# Altium PCB captivate_fr2633.PcbDoc (part 1 of 2)
Units mil, origin at the board's own origin, x right, y up, seen from the top; angles counter-clockwise.
Board outline 2500 x 2500 mil, 2 copper layers (Top Layer, Bottom Layer), stack 62 mil thick; 67 components, 64 nets, 248 pads, 53 vias.
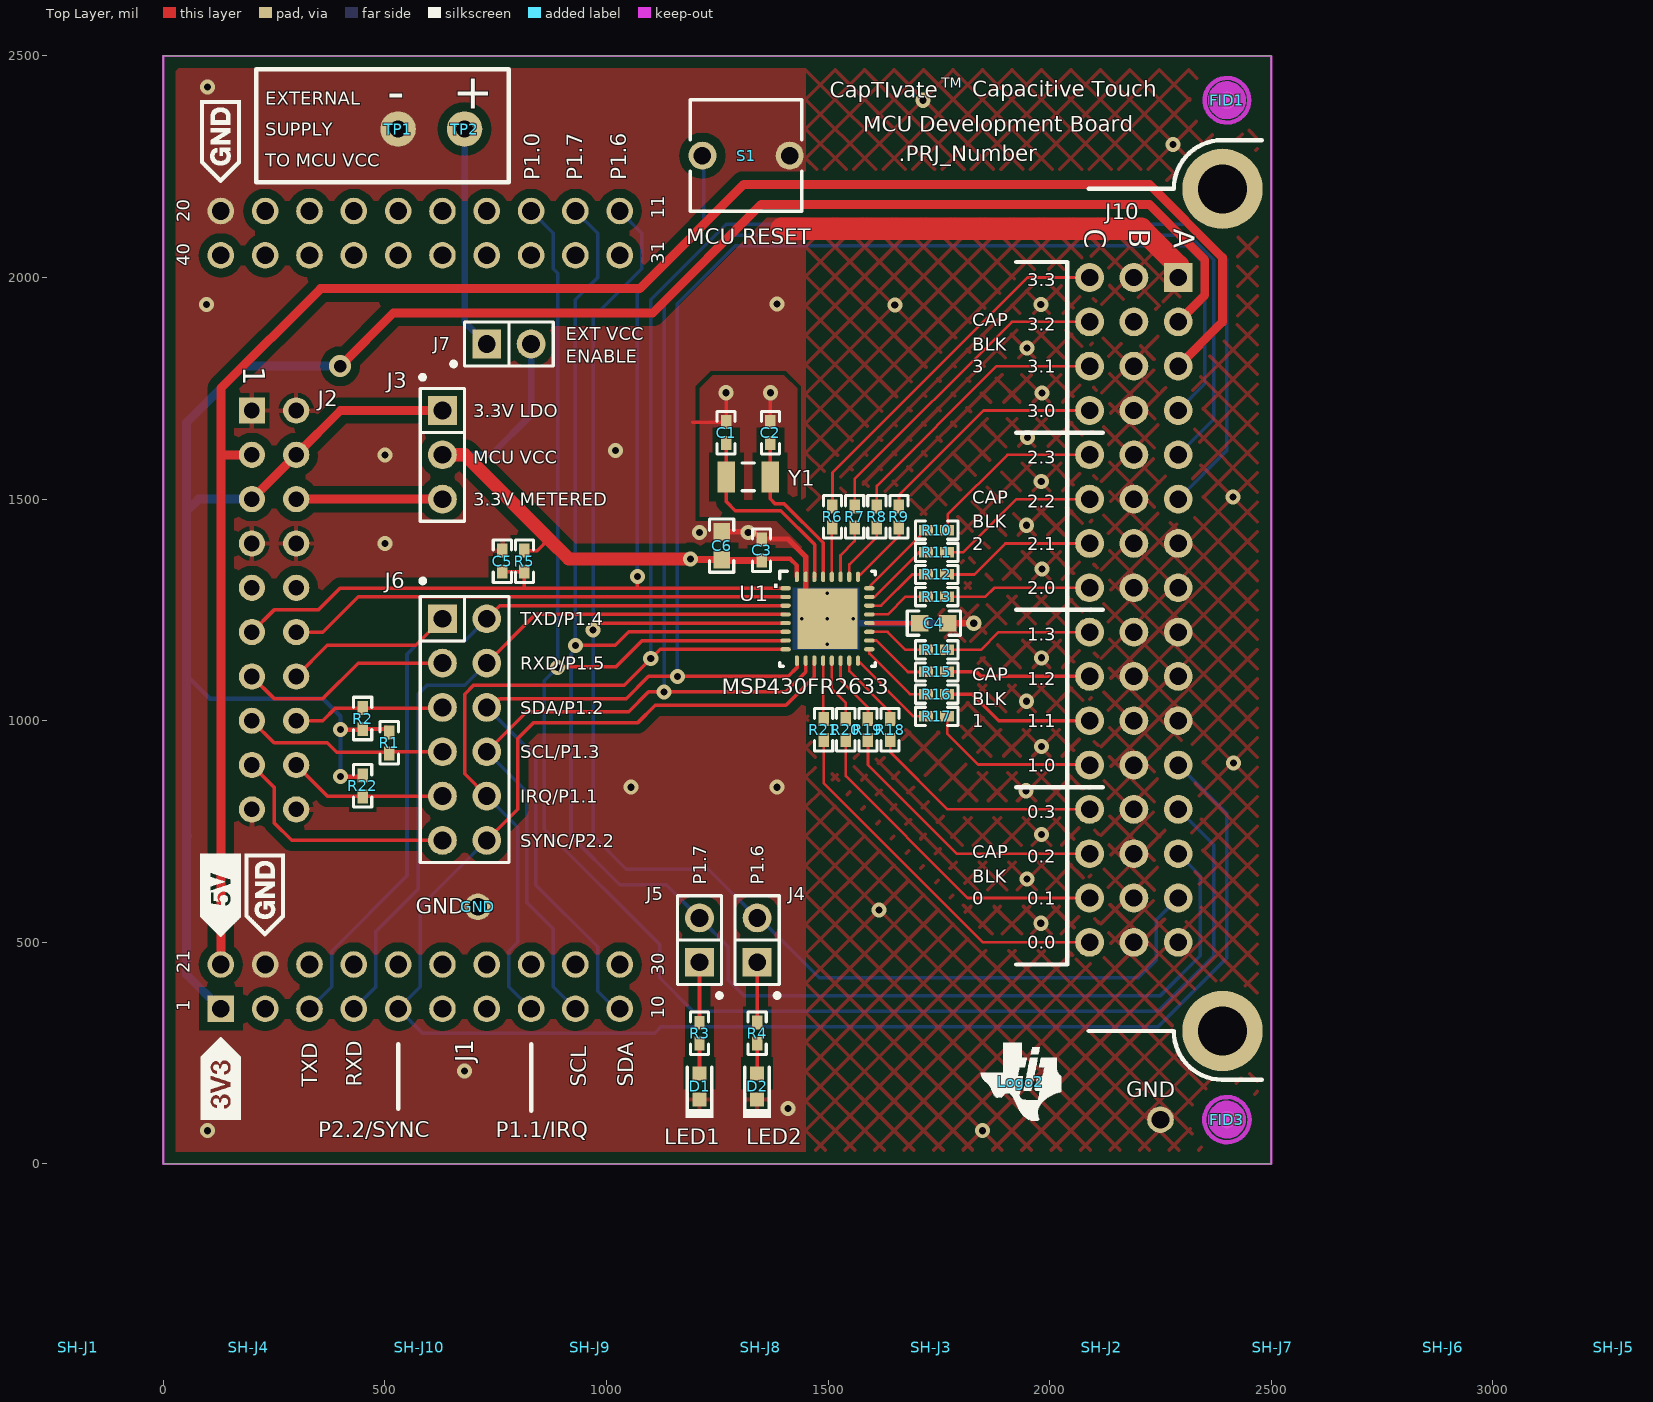
[diagram p0: Top Layer view]
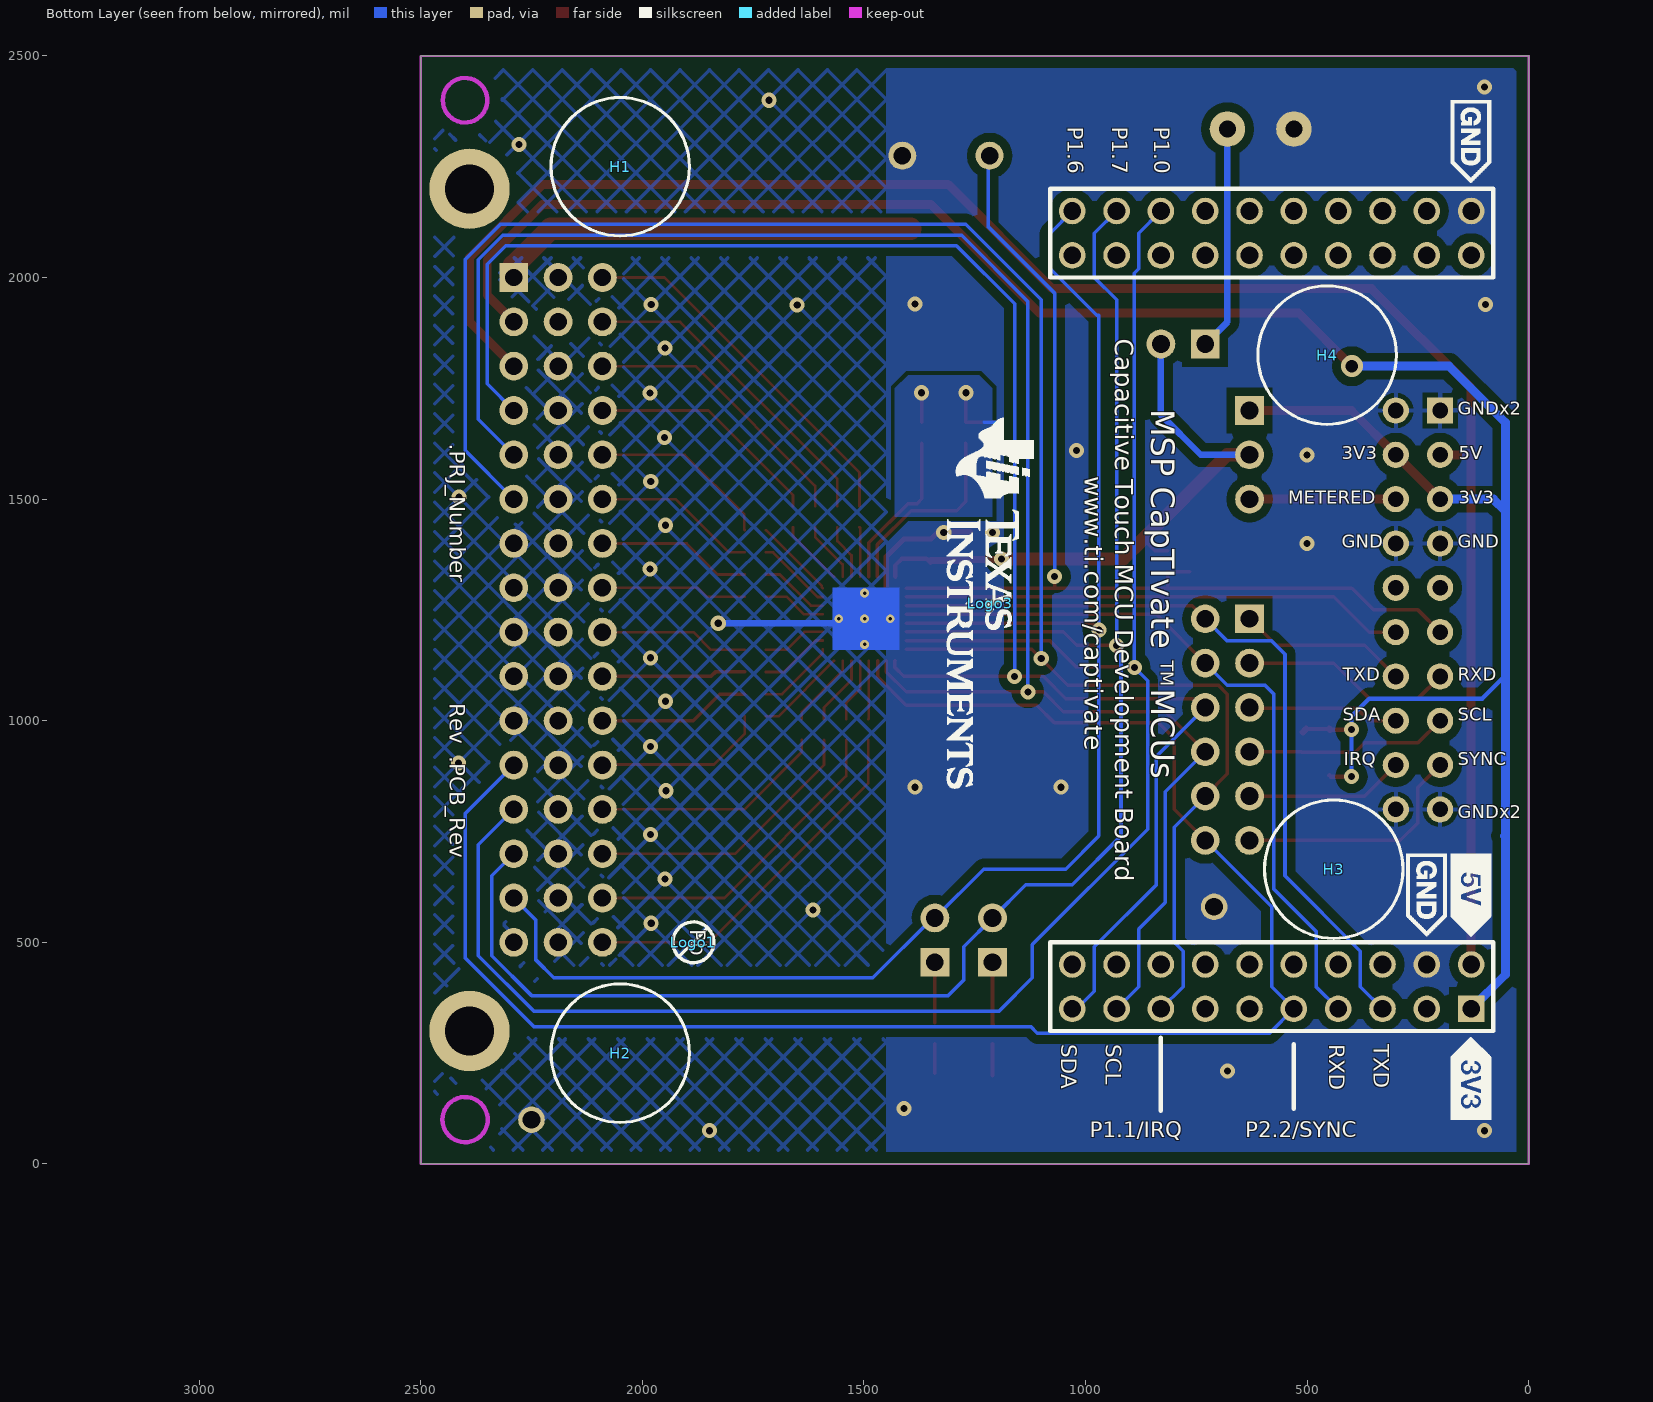
[diagram p1: Bottom Layer view, seen from below]

## Layer stack, top to bottom
Top Solder: solder mask 0.4, Solder Resist, Dk 3.5
Top Layer: signal copper 1.4
Dielectric1: core 59.2, FR-4, Dk 4.2
Bottom Layer: signal copper 1.4
Bottom Solder: solder mask 0.4, Solder Resist, Dk 3.5

## Board outline
0,0 0,2500 2500,2500 2500,0

## Design rules (kind name [scope] priority, off if disabled: settings)
AcuteAngle [All] p1: minimum=4.50000000000000E+0001 checktracksonly=FALSE
AssemblyTestPointUsage [All] p1: valid=2
Clearance Clearance_Keepouts [((IsTrack Or IsArc) And Not InPoly) And IsFree and IsKeepOut vs ((IsTrack Or IsArc) And Not InPoly) And IsFree and IsKeepOut] p1: gap=0
Clearance Clearance_BoardEdge_MountingHoles [OnCopper and InComponentClass('Mounting Holes') vs IsKeepOut] p2: gap=40
Clearance Clearance_BoardEdge_Poly [OnCopper and InPoly vs IsKeepOut] p3: gap=25
Clearance Clearance_Hatched_Poly [OnCopper AND (InNamedPolygon('hatched_gnd_top') OR InNamedPolygon('hatched_gnd_bottom')) vs InNetClass('CAPTIVATE_CONNS')] p4: gap=12
Clearance Clearance_BoardEdge [OnCopper and Not InComponentClass('Logo') and not InComponentClass('FiducialMark') and not InRegion(1000,500,4000,800) and Not IsKeepout vs IsKeepOut] p5: gap=40
Clearance Clearance_Poly [InPolygon] p6: gap=20
Clearance [All] p7: gap=7.87
ComponentClearance ComponentClearance_MountingHoles_FiducialMarks [InComponentClass('Mounting Holes') vs InComponentClass('FiducialMark')] p1: gap=50 collisioncheckmode=3 verticalgap=10 showdistances=FALSE
ComponentClearance ComponentClearance_TH_FiducialMarks [IsThruComponent vs InComponentClass('FiducialMark')] p2: gap=25 collisioncheckmode=3 verticalgap=10 showdistances=FALSE
ComponentClearance ComponentClearance_Shunt [InComponentClass('Header') vs InComponentClass('Shunt')] p3: gap=0 collisioncheckmode=3 verticalgap=0 showdistances=FALSE
ComponentClearance ComponentClearance_Logo [InComponentClass('Logo')] p4: gap=10 collisioncheckmode=3 verticalgap=10 showdistances=TRUE
ComponentClearance ComponentClearance_ScrewToNut [(HasFootprint('NY PMS 440 0025 PH')) vs (HasFootprint('Keystone_1902C'))] p5: gap=5 collisioncheckmode=3 verticalgap=10 showdistances=FALSE
ComponentClearance ComponentClearance_MountingHoles [InComponentClass('Mounting Holes')] p6: gap=250 collisioncheckmode=3 verticalgap=100000 showdistances=FALSE
ComponentClearance ComponentClearance_SmallPassives [HasFootprint('0201*') or HasFootprint('0402*') or HasFootprint('0508') or HasFootprint('0603*') or HasFootprint('0612') or HasFootprint('0805*') or HasFootprint('0815*') or HasFootprint('0830*') or HasFootprint('1206*') or HasFootprint('1210*') or HasFootprint('1808*') or HasFootprint('1812*') or HasFootprint('1825*') or HasFootprint('2010*') or HasFootprint('2220*') or HasFootprint('2225*') or HasFootprint('2512*') or HasFootprint('2728*') or HasFootprint('3518*') vs HasFootprint('0201*') or HasFootprint('0402*') or HasFootprint('0508') or HasFootprint('0603*') or HasFootprint('0612') or HasFootprint('0805*') or HasFootprint('0815*') or HasFootprint('0830*') or HasFootprint('1206*') or HasFootprint('1210*') or HasFootprint('1808*') or HasFootprint('1812*') or HasFootprint('1825*') or HasFootprint('2010*') or HasFootprint('2220*') or HasFootprint('2225*') or HasFootprint('2512*') or HasFootprint('2728*') or HasFootprint('3518*')] p7: gap=20 collisioncheckmode=3 verticalgap=10 showdistances=FALSE
ComponentClearance ComponentClearance_THtoSMT [IsThruComponent vs IsSMTComponent] p8: gap=0 collisioncheckmode=3 verticalgap=0 showdistances=FALSE
ComponentClearance ComponentClearance_THtoTH [IsThruComponent vs IsThruComponent] p9: gap=25 collisioncheckmode=3 verticalgap=100 showdistances=FALSE
ComponentClearance [All] p10: gap=40 collisioncheckmode=3 verticalgap=10 showdistances=FALSE
DiffPairsRouting [All] p1: maxlimit=100 minlimit=10 mostfreqgap=10 toplayer_minwidth=15 toplayer_maxwidth=15 toplayer_prefwidth=15 bottomlayer_minwidth=15 bottomlayer_maxwidth=15 bottomlayer_prefwidth=15 maxuncoupledlength=1000
FabricationTestPointUsage TestPointUsage [All] p1: valid=2 allowmultiple=FALSE
FabricationTestpoint Testpoint [All] p1: side=3 testpointundercomponent=TRUE minsize=40 maxsize=100 preferedsize=60 minholesize=0 maxholesize=40 preferedholesize=32 testpointgrid=1 allowsidetop=TRUE allowsidebottom=TRUE usegrid=TRUE gridtolerance=0.01
FanoutControl Fanout_LCC [IsLCC] p1: bgadir=Out bgaviamode=Centered fanoutstyle=Auto fanoutdirection=Alternating viagrid=1 // Fanout_LCC (Default Rule)
FanoutControl Fanout_BGA [IsBGA] p2: bgadir=Out bgaviamode=Centered fanoutstyle=Auto fanoutdirection=Alternating viagrid=1 // Fanout_BGA (Default Rule)
FanoutControl Fanout_Default [All] p4: bgadir=Out bgaviamode=Centered fanoutstyle=Auto fanoutdirection=Alternating viagrid=1 // Fanout_Default (Default Rule)
FanoutControl Fanout_Small [(CompPinCount < 5)] p5: bgadir=Out bgaviamode=Centered fanoutstyle=Auto fanoutdirection=OutThenIn viagrid=1 // Fanout_Small (Default Rule)
HoleSize [All] p1: absolutevalues=TRUE maxlimit=251 minlimit=7.87 maxpercent=80.000 minpercent=20.000
MinimumAnnularRing MinimumAnnularRing_ThermalPadVias [IsVia and InAnyComponent] p1: minimumring=5.91
MinimumAnnularRing [All] p2: minimumring=7
MinimumSolderMaskSliver MinimumSolderMaskSliver_Logo [InComponentClass('Logo') vs InComponentClass('Logo')] p1: minsoldermaskwidth=0.7
MinimumSolderMaskSliver [All] p2: minsoldermaskwidth=3.94
PlaneConnect [All] p1: planeconnectstyle=Relief reliefexpansion=10 reliefentries=4 reliefconductorwidth=10 reliefairgap=10
PolygonConnect PolygonConnect_solid [OnCopper AND InNet('GND') AND (InNamedPolygon('solid_gnd_top') OR InNamedPolygon('solid_gnd_bottom'))] p1: connectstyle=Relief reliefconductorwidth=10 reliefentries=4 polygonreliefangle="90 Angle" airgapwidth=10
PolygonConnect PolygonConnect_through_hole [(InPadClass('Through Hole'))] p2: connectstyle=Relief reliefconductorwidth=10 reliefentries=4 polygonreliefangle="90 Angle" airgapwidth=10
PolygonConnect PolygonConnect_vias [InNet('GND') AND IsVia] p3: connectstyle=Direct reliefconductorwidth=10 reliefentries=4 polygonreliefangle="90 Angle" airgapwidth=10
PolygonConnect [All] p4: connectstyle=Direct reliefconductorwidth=10 reliefentries=4 polygonreliefangle="90 Angle" airgapwidth=10
RoutingVias ThermalPadVias [IsVia and InAnyComponent] p1: holewidth=7.87 width=19.68 viastyle="Through Hole" minholewidth=7.87 minwidth=19.68 maxholewidth=12.99 maxwidth=23.62
RoutingVias [All] p2: holewidth=16 width=34 viastyle="Through Hole" minholewidth=7.87 minwidth=26 maxholewidth=40 maxwidth=65
SilkToBoardRegionClearance [Not ((IsComment or IsDesignator) And (Hide <> 'False')) and not InRegion(1000,500,4000,800)] p1:
SilkToSilkClearance SilkToSilkClearance_Pb-FreeLogo [(HasFootprint('Pb-Free_Overlay_Medium') OR HasFootprint('Pb-Free_Overlay_Small')) vs (HasFootprint('Pb-Free_Overlay_Medium') OR HasFootprint('Pb-Free_Overlay_Small'))] p1: silktosilkclearance=0
SilkToSilkClearance [All] p2: silktosilkclearance=5
SilkToSolderMaskClearance "Silk to Solder Mask Opening" [All] p1: minsilkscreentomaskgap=1 clearancetoexposedcopper=FALSE
SolderMaskExpansion [All] p1: expansion=3
UnpouredPolygon [All] p1: allowunpoured=FALSE
Width [All] p1: maxlimit=100 minlimit=6 preferedwidth=8 checkconnectedcopper=TRUE
14 further rules are at their usual default settings.

## Classes and differential pairs
net class J1_Nets: GND NetJ1_1 NetJ1_2 NetJ1_3 NetJ1_4 NetJ1_5 NetJ1_6 NetJ1_7 NetJ1_8 NetJ1_9 NetJ1_10 NetJ1_11 NetJ1_12 NetJ1_13 NetJ1_14 NetJ1_15 NetJ1_16 NetJ1_17 NetJ1_18 NetJ1_19 NetJ1_20 P1.0 P1.1/IRQ P1.6/LED2 P1.7/LED1 P2.2/SYNC UCA0_RXD UCA0_TXD UCB0_SCL UCB0_SDA VCC_5V VCC_LDO
pad class "Through Hole": C5-2 D1-2 D2-2 J2-1 J2-2 J2-7 J2-8 J2-19 J2-20 TP4-1
component class Shunt: SH-J1 SH-J2 SH-J3 SH-J4 SH-J5 SH-J6 SH-J7 SH-J8 SH-J9 SH-J10
component class Logo: Logo2 Logo3
component class AssemblyNote: ZZ1 ZZ2 ZZ3 ZZ4
component class processor: C1 C2 C3 C4 C5 C6 D1 D2 GND J1 J2 J3 J4 J5 J6 J7 J10 R1 R2 R3 R4 R5 R6 R7 R8 R9 R10 R11 R12 R13 R14 R15 R16 R17 R18 R19 R20 R21 R22 S1 TP1 TP2 U1 Y1
component class Header: J1 J3 J4 J5 J6 J7
net class C1_Nets: GND XIN
net class C6_Nets: GND VCC_MSP
net class C3_Nets: GND VCC_MSP
net class C4_Nets: GND VREG
net class C5_Nets: EZFET_SBWTDIO_RST GND
net class C2_Nets: GND XOUT
net class D1_Nets: GND NetD1_1
net class D2_Nets: GND NetD2_1
net class J2_Nets: EZFET_RXD EZFET_SBWTCK_TST EZFET_SBWTDIO_RST EZFET_TXD GND MSP_IRQ MSP_RXD MSP_SCL MSP_SDA MSP_SYNC MSP_TXD VCC_5V VCC_LDO VCC_METERED
net class J3_Nets: VCC_LDO VCC_METERED VCC_MSP
net class J4_Nets: NetJ4_1 P1.6/LED2
net class J5_Nets: NetJ5_1 P1.7/LED1
net class J7_Nets: NetJ7_1 VCC_MSP
net class J6_Nets: MSP_IRQ MSP_RXD MSP_SCL MSP_SDA MSP_SYNC MSP_TXD P1.1/IRQ P2.2/SYNC UCA0_RXD UCA0_TXD UCB0_SCL UCB0_SDA
net class TP1_Nets: GND
net class R2_Nets: MSP_SDA VCC_LDO
net class R1_Nets: MSP_SCL VCC_LDO
net class R3_Nets: NetD1_1 NetJ5_1
net class R4_Nets: NetD2_1 NetJ4_1
net class R5_Nets: EZFET_SBWTDIO_RST VCC_MSP
net class R6_Nets: CAP3.3 NetJ10_c1
net class R7_Nets: CAP3.2 NetJ10_c2
net class R8_Nets: CAP3.1 NetJ10_c3
net class R9_Nets: CAP3.0 NetJ10_c4
net class R10_Nets: CAP2.3 NetJ10_c5
net class R11_Nets: CAP2.2 NetJ10_c6
net class R12_Nets: CAP2.1 NetJ10_c7
net class R13_Nets: CAP2.0 NetJ10_c8
net class R14_Nets: CAP1.3 NetJ10_c9
net class R15_Nets: CAP1.2 NetJ10_c10
net class R16_Nets: CAP1.1 NetJ10_c11
net class R17_Nets: CAP1.0 NetJ10_c12
net class R18_Nets: CAP0.3 NetJ10_c13
net class R19_Nets: CAP0.2 NetJ10_c14
net class R20_Nets: CAP0.1 NetJ10_c15
net class R21_Nets: CAP0.0 NetJ10_c16
net class R22_Nets: MSP_IRQ VCC_LDO
net class S1_Nets: EZFET_SBWTDIO_RST GND
net class U1_Nets: CAP0.0 CAP0.1 CAP0.2 CAP0.3 CAP1.0 CAP1.1 CAP1.2 CAP1.3 CAP2.0 CAP2.1 CAP2.2 CAP2.3 CAP3.0 CAP3.1 CAP3.2 CAP3.3 EZFET_SBWTCK_TST EZFET_SBWTDIO_RST GND P1.0 P1.1/IRQ P1.6/LED2 P1.7/LED1 P2.2/SYNC UCA0_RXD UCA0_TXD UCB0_SCL UCB0_SDA VCC_MSP VREG XIN XOUT
net class Y1_Nets: XIN XOUT
net class J10_Nets: GND NetJ10_c1 NetJ10_c2 NetJ10_c3 NetJ10_c4 NetJ10_c5 NetJ10_c6 NetJ10_c7 NetJ10_c8 NetJ10_c9 NetJ10_c10 NetJ10_c11 NetJ10_c12 NetJ10_c13 NetJ10_c14 NetJ10_c15 NetJ10_c16 P1.0 P1.1/IRQ P1.6/LED2 P1.7/LED1 P2.2/SYNC UCB0_SCL UCB0_SDA VCC_5V VCC_LDO
net class CAPTIVATE_CONNS: NetJ10_c1 NetJ10_c2 NetJ10_c3 NetJ10_c4 NetJ10_c5 NetJ10_c6 NetJ10_c7 NetJ10_c8 NetJ10_c9 NetJ10_c10 NetJ10_c11 NetJ10_c12 NetJ10_c13 NetJ10_c14 NetJ10_c15 NetJ10_c16
component class hardware: FID1 FID3 H1 H2 H3 H4 Logo1 Logo2 Logo3 SH-J1 SH-J2 SH-J3 SH-J4 SH-J5 SH-J6 SH-J7 SH-J8 SH-J9 SH-J10 ZZ1 ZZ2 ZZ3 ZZ4
component class FiducialMark: FID1 FID3
net class GND_Nets: GND
net class TP2_Nets: NetJ7_1

## Components (designator, comment, footprint, x,y, rotation, side; value= is the part's Value field where it differs from the comment)
C1 "GRM1555C1H220JA01D" 0402 1270,1650 r90 top
C2 "GRM1555C1H220JA01D" 0402 1370,1650 r90 top
C3 "C1005X5R1A104K" 0402 1350,1385 r90 top
C4 "C1608X5R1A105K" 0603 1738.66,1220 r0 top
C5 "C1005X7R1H102K" 0402 765,1360 r90 top
C6 "CGB3B1X5R1A475K055AC" 0603 1260,1395 r90 top
D1 "LTST-C190GKT" LED_LTST-C190 1210,175 r270 top
D2 "LTST-C190GKT" LED_LTST-C190 1340,175 r270 top
FID1 "Fiducial" Fiducial10-20 2400,2400 r90 top
FID3 "Fiducial" Fiducial10-20 2400,100 r90 top
GND "TESTPOINT" TP_VIA_060RND040 710,580 r90 top
H1 "SJ61A1" Bumpon_SJ61A1 2050,2250 r180 bottom
H2 "SJ61A1" Bumpon_SJ61A1 2050,250 r180 bottom
H3 "SJ61A1" Bumpon_SJ61A1 440,665 r180 bottom
H4 "SJ61A1" Bumpon_SJ61A1 455,1825 r180 bottom
J1 "TSW-110-07-G-S" "40Pin BP" 580,1250 r90 top locked
J2 "Connector 10X2RA" CONN2X10RA 200,1699.95 r270 top locked
J3 "HTSW-103-07-G-S" Samtec_HTSW-103-07-G-S 630,1600 r270 top
J4 "HTSW-102-07-G-S" Samtec_HTSW-102-07-G-S 1340,505 r90 top
J5 "HTSW-102-07-G-S" Samtec_HTSW-102-07-G-S 1210,505 r90 top
J6 "TSW-106-07-G-D" TSW-106-07-G-D 680,980 r270 top
J7 "HTSW-102-07-G-S" Samtec_HTSW-102-07-G-S 780,1850 r0 top
J10 "09 28 248 6921" CAPTIVATE-CONN-48-NONUM 2498.66,1250 r270 top locked
Logo1 "Pb-Free Symbol" Pb-Free_Overlay_Small 1885,500 r270 bottom
Logo2 "Texas Instruments" TI_Symbol_Overlay_Small 1935,185 r0 top
Logo3 "Texas Instruments" TI_Stacked_Overlay_Small 1215,1265 r270 bottom
R1 "CRCW04022K20JNED" 0402 510,950 r90 top
R2 "CRCW04022K20JNED" 0402 450,1005 r270 top
R3 "CRCW0402390RJNED" 0402 1209.99,294.99 r90 top
R4 "CRCW0402390RJNED" 0402 1340,295 r90 top
R5 "CRCW040247K0JNED" 0402 815,1360 r90 top
R6 "CRCW0402470RJNED" 0402 1510,1460 r270 top
R7 "CRCW0402470RJNED" 0402 1560,1460 r270 top
R8 "CRCW0402470RJNED" 0402 1610,1460 r270 top
R9 "CRCW0402470RJNED" 0402 1660,1460 r270 top
R10 "CRCW0402470RJNED" 0402 1745,1430 r180 top
R11 "CRCW0402470RJNED" 0402 1745,1380 r180 top
R12 "CRCW0402470RJNED" 0402 1745,1330 r180 top
R13 "CRCW0402470RJNED" 0402 1745,1280 r180 top
R14 "CRCW0402470RJNED" 0402 1745,1160 r180 top
R15 "CRCW0402470RJNED" 0402 1745,1110 r180 top
R16 "CRCW0402470RJNED" 0402 1745,1060 r180 top
R17 "CRCW0402470RJNED" 0402 1745,1010 r180 top
R18 "CRCW0402470RJNED" 0402 1640,980 r90 top
R19 "CRCW0402470RJNED" 0402 1590,980 r90 top
R20 "CRCW0402470RJNED" 0402 1540,980 r90 top
R21 "CRCW0402470RJNED" 0402 1490,980 r90 top
R22 "CRCW040210K0JNED" 0402 450,853 r90 top
S1 "EVQ-21505R" SW_EVQ-21x05 1315,2275 r180 top
SH-J1 "SPC02SYAN" SPC02SYAN -192,-414 r90 top
SH-J2 "SPC02SYAN" SPC02SYAN 2118,-414 r90 top
SH-J3 "SPC02SYAN" SPC02SYAN 1733,-414 r90 top
SH-J4 "SPC02SYAN" SPC02SYAN 193,-414 r90 top
SH-J5 "SPC02SYAN" SPC02SYAN 3273,-414 r90 top
SH-J6 "SPC02SYAN" SPC02SYAN 2888,-414 r90 top
SH-J7 "SPC02SYAN" SPC02SYAN 2503,-414 r90 top
SH-J8 "SPC02SYAN" SPC02SYAN 1348,-414 r90 top
SH-J9 "SPC02SYAN" SPC02SYAN 963,-414 r90 top
SH-J10 "SPC02SYAN" SPC02SYAN 578,-414 r90 top
TP1 "-" TESTPOINT 530,2335 r0 top
TP2 "+" TESTPOINT 680,2335 r0 top
U1 "MSP430FR2633IRHB" RHB0032E 1498.66,1230.08 r0 top locked
Y1 "FC-135 32.7680KA-A3" Epson_FC-135 1320,1550 r0 top
ZZ1 "All Jumpers to be installed (Note: J3 jumper installed between 3.3V LDO and MCU VCC pins)" AssemblyNote -460,3060 r0 top
ZZ2 "These assemblies are ESD sensitive, ESD precautions shall be observed." AssemblyNote -465,2979.11 r0 top
ZZ3 "These assemblies must be clean and free from flux and all contaminants. Use of no clean flux is not acceptable." AssemblyNote -465,2890.56 r0 top
ZZ4 "These assemblies must comply with workmanship standards IPC-A-610 Class 2, unless otherwise specified." AssemblyNote -465,2802 r0 top

## Footprints (in the part's own frame and the unit in brackets; to place one, negate y for a bottom-side part, rotate by r counter-clockwise, add the part's x,y. Pads: shape width x height; smd on the part's side, far side on the other; paste and mask are expansions set on the pad)
"40Pin BP" [mil] "40Pin Booster Pack Connection (Top - male; Bottom - female)"
  rect 60x60 hole 40: 1(-900,450)
  round 60 hole 40: 2(-900,350) 3(-900,250) 4(-900,150) 5(-900,50) 6(-900,-50) 7(-900,-150) 8(-900,-250) 9(-900,-350) 10(-900,-450) 11(900,-450) 12(900,-350) 13(900,-250) 14(900,-150) 15(900,-50) 16(900,50) 17(900,150) 18(900,250) 19(900,350) 20(900,450) 21(-800,450) 22(-800,350) 23(-800,250) 24(-800,150) 25(-800,50) 26(-800,-50) 27(-800,-150) 28(-800,-250) 29(-800,-350) 30(-800,-450) 31(800,-450) 32(800,-350) 33(800,-250) 34(800,-150) 35(800,-50) 36(800,50) 37(800,150) 38(800,250) 39(800,350) 40(800,450)
  silkscreen extent -1150,305 1150,495, body extent -950,-500 950,500, height 335
0402 [mm] "0402 from SM-752 data"
  rect 0.8x0.6 smd: 1(-0.6,0) 2(0.6,0)
  silkscreen extent -1.22,-0.52 1.22,0.52, body extent -0.55,-0.3 0.55,0.3, height 0.6
0603 [mm] "0603 from SM-752 data"
  rect 1x0.95 smd: 1(-0.8,0) 2(0.8,0)
  silkscreen extent -1.52,-0.69 1.52,0.69, body extent -0.87,-0.47 0.87,0.47, height 0.85
AssemblyNote [mil] "Assembly Note"
Bumpon_SJ61A1 [mil] "3M Cylindrical Bumpon black"
  round 1 on Mech4: 0(0,0)
  silkscreen extent -156,-156 156,156, body extent -156,-155 156,156, height 201
CAPTIVATE-CONN-48-NONUM [mm] "Connector, 3x16, 100mil, TH, RA"
  rect 1.65x1.65 hole 1: A1(-19.05,-5.3)
  round 1.65 hole 1: A2(-16.51,-5.3) A3(-13.97,-5.3) A4(-11.43,-5.3) A5(-8.89,-5.3) A6(-6.35,-5.3) A7(-3.81,-5.3) A8(-1.27,-5.3) A9(1.27,-5.3) A10(3.81,-5.3) A11(6.35,-5.3) A12(8.89,-5.3) A13(11.43,-5.3) A14(13.97,-5.3) A15(16.51,-5.3) A16(19.05,-5.3) B1(-19.05,-7.84) B2(-16.51,-7.84) B3(-13.97,-7.84) B4(-11.43,-7.84) B5(-8.89,-7.84) B6(-6.35,-7.84) B7(-3.81,-7.84) B8(-1.27,-7.84) B9(1.27,-7.84) B10(3.81,-7.84) B11(6.35,-7.84) B12(8.89,-7.84) B13(11.43,-7.84) B14(13.97,-7.84) B15(16.51,-7.84) B16(19.05,-7.84) C1(-19.05,-10.38) C2(-16.51,-10.38) C3(-13.97,-10.38) C4(-11.43,-10.38) C5(-8.89,-10.38) C6(-6.35,-10.38) C7(-3.81,-10.38) C8(-1.27,-10.38) C9(1.27,-10.38) C10(3.81,-10.38) C11(6.35,-10.38) C12(8.89,-10.38) C13(11.43,-10.38) C14(13.97,-10.38) C15(16.51,-10.38) C16(19.05,-10.38)
  round 4.6 hole 2.8: H1(-24.13,-2.76) H2(24.13,-2.76)
  silkscreen extent -26.92,-10.41 26.92,-0.51, body extent -26.92,-5.33 26.92,6.86, height 6.6
CONN2X10RA [mm] "Connector;F-Receptacle; 10x2 Position; Right Angle"
  rect 1.5x1.5 hole 0.9: 1(0,0)
  round 1.5 hole 0.9: 2(0,2.54) 3(2.54,0) 4(2.54,2.54) 5(5.08,0) 6(5.08,2.54) 7(7.62,0) 8(7.62,2.54) 9(10.16,0) 10(10.16,2.54) 11(12.7,0) 12(12.7,2.54) 13(15.24,0) 14(15.24,2.54) 15(17.78,0) 16(17.78,2.54) 17(20.32,0) 18(20.32,2.54) 19(22.86,0) 20(22.86,2.54)
  body extent -1.52,-10.03 24.38,-1.52, height 4.95
Epson_FC-135 [mm] "SMD, 2-Leads, Body 3.2x1.5mm"
  rect 1x1.8 smd: 1(-1.25,0) 2(1.25,0)
  silkscreen extent -0.35,-0.8 0.35,0.8, body extent -1.65,-0.8 1.65,0.8, height 0.9
Fiducial10-20 [mm]
  round 1 smd mask+0.5: 1(0,0)
  Top Layer keep-out circle w1.178: c0,0 r0.5
LED_LTST-C190 [mm] "Lite-On"
  rect 0.8x0.8 smd: 1(-0.75,0) 2(0.75,0)
  silkscreen extent -1.1,-0.8 1.8,0.8, body extent -0.85,-0.45 0.85,0.45, height 0.9
Pb-Free_Overlay_Small [mil]
  silkscreen extent -46,-46 46,46
RHB0032E [mm] "QFN, 32-Leads, Body 5x5mm, Pitch 0.5mm, Thermal Pad 3.45x3.45mm, TI Recommended"
  oval 0.6x0.24 smd: 1(-2.4,1.75) 2(-2.4,1.25) 3(-2.4,0.75) 4(-2.4,0.25) 5(-2.4,-0.25) 6(-2.4,-0.75) 7(-2.4,-1.25) 8(-2.4,-1.75) 17(2.4,-1.75) 18(2.4,-1.25) 19(2.4,-0.75) 20(2.4,-0.25) 21(2.4,0.25) 22(2.4,0.75) 23(2.4,1.25) 24(2.4,1.75)
  oval 0.24x0.6 smd: 9(-1.75,-2.4) 10(-1.25,-2.4) 11(-0.75,-2.4) 12(-0.25,-2.4) 13(0.25,-2.4) 14(0.75,-2.4) 15(1.25,-2.4) 16(1.75,-2.4) 25(1.75,2.4) 26(1.25,2.4) 27(0.75,2.4) 28(0.25,2.4) 29(-0.25,2.4) 30(-0.75,2.4) 31(-1.25,2.4) 32(-1.75,2.4)
  rect 3.45x3.45 smd paste-1.725: 33(0,0)
  silkscreen extent -2.72,-2.73 2.72,2.73, body extent -2.57,-2.57 2.58,2.58, height 1.01
Samtec_HTSW-102-07-G-S [mm] "Samtec 100mil, 1x2, 230 mil above insulator"
  rect 1.65x1.65 hole 1.016: 1(-1.27,0)
  round 1.65 hole 1.016: 2(1.27,0)
  silkscreen extent -3.3,-1.27 2.54,1.27, body extent -2.54,-1.27 2.54,1.27, height 8.38
Samtec_HTSW-103-07-G-S [mm] "Samtec 100mil, 1x3, 230 mil above insulator"
  rect 1.65x1.65 hole 1.016: 1(-2.54,0)
  round 1.65 hole 1.016: 2(0,0) 3(2.54,0)
  silkscreen extent -4.57,-1.27 3.81,1.27, body extent -3.81,-1.27 3.81,1.27, height 8.38
SPC02SYAN [mil] "SULLINS"
  round 1 on Mech3: 0(0,0)
  body extent -98,-47 99,47, height 366
SW_EVQ-21x05 [mm] "Panasonic"
  round 1.6 hole 1: 1(-2.5,0) 2(2.5,0)
  silkscreen extent -3.2,-3.2 3.2,3.2, body extent -3.15,-3.15 3.15,3.15, height 5.2
TESTPOINT [mil]
  round 80 hole 37.99: 1(0,0)
TI_Stacked_Overlay_Small [mil]
  silkscreen extent -418,-98 418,98
TI_Symbol_Overlay_Small [mil]
  silkscreen extent -90,-88 91,88
TP_VIA_060RND040 [mil] "TP_VIA_060RND040"
  round 60 hole 40: 1(0,0)
TSW-106-07-G-D [mm] "Samtec 100mil, 2x6, 230 mil above insulator"
  rect 1.65x1.65 hole 1.016: 1(-6.35,-1.27)
  round 1.65 hole 1.016: 2(-6.35,1.27) 3(-3.81,-1.27) 4(-3.81,1.27) 5(-1.27,-1.27) 6(-1.27,1.27) 7(1.27,-1.27) 8(1.27,1.27) 9(3.81,-1.27) 10(3.81,1.27) 11(6.35,-1.27) 12(6.35,1.27)
  silkscreen extent -8.64,-2.54 7.62,2.54, body extent -7.62,-2.54 7.62,2.54, height 8.38

## Part data
C1 C2: "CAP, CERM, 22 pF, 50 V, +/- 5%, C0G/NP0, 0402"
C3: "CAP, CERM, 0.1uF, 10V, +/-10%, X5R, 0402"
C4: "CAP, CERM, 1 µF, 10 V, +/- 10%, X5R, 0603"
C5: "CAP, CERM, 1000pF, 50V, +/-10%, X7R, 0402"
C6: "CAP, CERM, 4.7 µF, 10 V, +/- 10%, X5R, 0603"
D1 D2: "LED, Green, SMD"
FID1 FID3: "Fiducial mark.  There is nothing to buy or mount."
GND: "TEST POINT.  No entry in BOM."
H1 H2 H3 H4: "Bumpon, Cylindrical, 0.312 X 0.200, Black"
J1: library part "BoosterPack Connector", "Header, 100mil, 10x1, Gold, TH"
J2: "Connector, Female, 10-Pin, 2 row, Right Angle"
J3: "Header, 100mil, 3x1, Gold, TH"
J4 J5 J7: "Header, 100mil, 2x1, Gold, TH"
J6: "Header, 100mil, 6x2, Gold, TH"
J10: library part CAPTIVATE-CONN-MSP-EXP430FR2633-PROC, "CapTIvate Processor-Side Connector, 3x16, 100mil, TH, RA, F, MSP-EXP430FR2633"
Logo1: library part Pb-Free
Logo2 Logo3: library part TI_Logo, "Texas Instrument Corporate Signature"
R1 R2: "RES, 2.2 k, 5%, 0.063 W, 0402"
R3 R4: "RES, 390 ohm, 5%, 0.063W, 0402"
R5: "RES, 47k ohm, 5%, 0.063W, 0402"
R6 R7 R8 R9 R10 R11 R12 R13 R14 R15 R16 R17 R18 R19 R20 R21: "RES, 470, 5%, 0.063 W, 0402"
R22: "RES, 10 k, 5%, 0.063 W, 0402"
S1: "Switch, Tactile, SPST-NO, 0.02A, 15V, TH"
SH-J1 SH-J2 SH-J3 SH-J4 SH-J5 SH-J6 SH-J7 SH-J8 SH-J9 SH-J10: "Shunt, 100mil, Flash Gold, Black"
TP1 TP2: library part TESTPOINT, "TEST POINT.  No entry in BOM."
U1: "MSP430 Captivate Microcontroller"
Y1: "Crystal, 32.768 KHz, 12.5 pF, SMD"
ZZ1 ZZ2 ZZ3 ZZ4: library part AssemblyNote

## Free pads (board coordinates)
  round 60 hole 40: 1(2250,100)

## Via types
v1: diameter 34, hole 16, Top Layer to Bottom Layer, tented both sides, 47 vias
v2: diameter 19.68, hole 7.87, Top Layer to Bottom Layer, 5 vias
v3: diameter 50, hole 28, Top Layer to Bottom Layer, tented both sides, 1 vias

## Nets (pads, with @x,y where several pads share a name; then routed paths per layer and width w, separated by ;. In a path a pad name is that pad's centre, name@x,y a point inside that pad or via, vN(x,y) a via of type N, cw(c..) or ccw(c..) an arc to the next point about the centre after c; other vN are vias at no path point)
CAP0.0: R21.2 U1.12 | length 132.5
  Top Layer w6: U1.12@1488.82,1135.59 1488.82,1004.8 R21.2@1490,1003.62
CAP0.1: R20.2 U1.13 | length 145
  Top Layer w6: U1.13@1508.5,1135.59 1508.5,1071.5 1540,1040 R20.2@1540,1003.62
CAP0.2: R19.2 U1.14 | length 157.6
  Top Layer w6: U1.14@1528.19,1135.59 1528.19,1091.81 1590,1030 R19.2@1590,1003.62
CAP0.3: R18.2 U1.15 | length 170.1
  Top Layer w6: U1.15@1547.87,1135.59 1547.87,1112.13 1640,1020 R18.2@1640,1003.62
CAP1.0: R17.2 U1.16 | length 206.7
  Top Layer w6: U1.16@1568.15,1135 U1.16@1567.56,1135.59 1693.15,1010 R17.2@1721.38,1010
CAP1.1: R16.2 U1.17 | length 175.6
  Top Layer w6: U1.17@1593.15,1161.18 1593.15,1151.85 1685,1060 R16.2@1721.38,1060
CAP1.2: R15.2 U1.18 | length 157.6
  Top Layer w6: U1.18@1593.15,1180.87 1609.13,1180.87 1680,1110 R15.2@1721.38,1110
CAP1.3: R14.2 U1.19 | length 145
  Top Layer w6: U1.19@1593.15,1200.55 1634.45,1200.55 1675,1160 R14.2@1721.38,1160
CAP2.0: R13.2 U1.21 | length 144.8
  Top Layer w6: U1.21@1593.15,1239.92 1634.92,1239.92 1675,1280 R13.2@1721.38,1280
CAP2.1: R12.2 U1.22 | length 157.4
  Top Layer w6: U1.22@1593.15,1259.61 1619.61,1259.61 1690,1330 R12.2@1721.38,1330
CAP2.2: R11.2 U1.23 | length 169.9
  Top Layer w6: U1.23@1593.15,1279.29 1604.29,1279.29 1705,1380 R11.2@1721.38,1380
CAP2.3: R10.2 U1.24 | length 184.1
  Top Layer w6: U1.24@1593.15,1298.98 1595,1300.83 1595,1303.62 R10.2@1721.38,1430
CAP3.0: R9.2 U1.25 | length 150.1
  Top Layer w6: U1.25@1567.56,1324.57 1660,1417.01 R9.2@1660,1436.38
CAP3.1: R8.2 U1.26 | length 137.5
  Top Layer w6: U1.26@1547.87,1324.57 1547.87,1352.87 1610,1415 R8.2@1610,1436.38
CAP3.2: R7.2 U1.27 | length 125
  Top Layer w6: U1.27@1528.19,1324.57 1528.19,1373.19 1560,1405 R7.2@1560,1436.38
CAP3.3: R6.2 U1.28 | length 112.4
  Top Layer w6: U1.28@1508.5,1324.57 1508.5,1434.88 R6.2@1510,1436.38
EZFET_RXD: J2.9
EZFET_SBWTCK_TST: J2.12 U1.2 | length 1137.4
  Top Layer w8: J2.12@300,1199.95 359.95,1199.95 440,1280 500,1280 U1.2@1404.17,1279.29
EZFET_SBWTDIO_RST: C5.1 J2.11 R5.1 S1.2 U1.1 | length 2372.2
  Top Layer w8: J2.11@200,1199.95 250,1250 350,1250 398.98,1298.98 815,1298.98 ; C5.1@765,1336.38 R5.1@815,1336.38 815,1298.98 ; v1(1070,1325) 1070,1298.98 ; U1.1@1404.17,1298.98 1070,1298.98 ; 815,1298.98 1070,1298.98
  Bottom Layer w8: v1(1070,1325) 1070,1965 1220,2115 1220,2271.57 S1.2@1216.57,2275
EZFET_TXD: J2.10
GND: C1.2 C2.2 C3.2 C4.2 C5.2 C6.2 D1.2 D2.2 GND.1 J1.20 J1.22 J2.1 J2.2 J2.7 J2.8 J2.19 J2.20 J10.A1 J10.A7 J10.A8 J10.A9 J10.A10 J10.A11 J10.A16 J10.B1 J10.B3 J10.B4 J10.B5 J10.B6 J10.B7 J10.B8 J10.B9 J10.B10 J10.B11 J10.B12 J10.B13 J10.B14 J10.B15 J10.B16 pad.1 S1.1 TP1.1 U1.31 U1.33 | length 1858.6
  Top Layer w8: 1195,1673.62 C1.2@1270,1673.62 v1(1270,1740) ; C2.2@1370,1673.62 v1(1370,1740) ; 1449.45,1299.21 U1.33@1498.66,1250
  Top Layer w12: C6.2@1260,1426.5 1332.13,1426.5 1348.62,1410 1410,1410 1449.45,1370.55 U1.31@1449.45,1324.57 1449.45,1299.21
  Top Layer w15: C4.2@1770.16,1220 v1(1828.66,1220)
  Top Layer w50: 1395,2110 2206.63,2110 J10.A1@2290,2026.63
  Bottom Layer w8: 1195,1673.62 1228.18,1673.62
  Bottom Layer w15: v2(1556.73,1230.08) 1559.92,1230.08 1570,1220 v1(1828.66,1220)
  other v1: 100,75 1848.15,75 1410,125 680,210 1980,543 1615,573 1949,643 1982,743 1947,842 1055,850 1385,850 2415,904.61 1982,942 1948,1044 1982,1142 1983,1342 500,1400 1210,1425 1320,1425 1948,1441 2414.06,1505 1981,1540 500,1600 1020,1610 1950,1639.15 1983,1739 1949,1841 1650.57,1937.93 98,1939 1980,1939 1385,1940 2278.51,2300 1713.83,2400 100,2430
  other v2: 1498.66,1172.01 1440.59,1230.08 1498.66,1230.08 1498.66,1288.15
MSP_IRQ: J2.18 J6.9 R22.1 | length 359.5
  Top Layer w8: J2.18@300,899.95 370.58,829.38 R22.1@450,829.38 629.38,829.38 J6.9@630,830
MSP_RXD: J2.13 J6.3 | length 483.8
  Top Layer w8: J2.13@200,1099.95 249.95,1050 360,1050 440,1130 J6.3@630,1130
MSP_SCL: J2.15 J6.7 R1.1 | length 462.1
  Top Layer w8: J2.15@200,999.95 250,950 370,950 391.38,928.62 512.24,928.62 513.62,930 J6.7@630,930 J6.7@628.62,928.62
MSP_SDA: J2.16 J6.5 R2.1 | length 354.6
  Top Layer w8: J2.16@300,999.95 359.95,999.95 388.62,1028.62 R2.1@450,1028.62 628.62,1028.62 J6.5@630,1030 J6.5@621.38,1038.62
MSP_SYNC: J2.17 J6.11 | length 557.2
  Top Layer w8: J2.17@200,890 J2.17@200,899.95 250,849.95 250,770 290,730 J6.11@630,730
MSP_TXD: J2.14 J6.1 | length 383.9
  Top Layer w8: J2.14@300,1099.95 370.05,1170 570,1170 J6.1@630,1230
NetD1_1: D1.1 R3.1 | length 71.9
  Top Layer w8: D1.1@1209.99,199.52 R3.1@1209.99,271.37
NetD2_1: D2.1 R4.1 | length 66.9
  Top Layer w8: D2.1@1340,204.52 R4.1@1340,271.38
NetJ4_1: J4.1 R4.2 | length 136.4
  Top Layer w8: R4.2@1340,318.62 J4.1@1340,455
NetJ5_1: J5.1 R3.2 | length 142.5
  Top Layer w8: R3.2@1209.99,313.62 1208.62,314.99 1210,316.38 J5.1@1210,455
NetJ7_1: J7.1 TP2.1 | length 495.7
  Bottom Layer w15: TP2.1@680,2325 680,1900 J7.1@730,1850
NetJ10_c1: J10.C1 R6.1 | length 838.6
  Top Layer w6: R6.1@1510,1483.62 1510,1560 1950,2000 J10.C1@2090,2000
NetJ10_c2: J10.C2 R7.1 | length 738.4
  Top Layer w6: R7.1@1560,1483.62 1560,1545 1915,1900 J10.C2@2090,1900
NetJ10_c3: J10.C3 R8.1 | length 638.2
  Top Layer w6: R8.1@1610,1483.62 1610,1530 1880,1800 J10.C3@2090,1800
NetJ10_c4: J10.C4 R9.1 | length 534.6
  Top Layer w6: R9.1@1660,1483.62 1660,1509.21 1850.79,1700 J10.C4@2090,1700
NetJ10_c5: J10.C5 R10.1 | length 411.5
  Top Layer w6: R10.1@1768.62,1430 1770,1431.38 1770,1465 1905,1600 J10.C5@2090,1600
NetJ10_c6: J10.C6 R11.1 | length 371.1
  Top Layer w6: R11.1@1768.62,1380 1805,1380 1925,1500 J10.C6@2090,1500
NetJ10_c7: J10.C7 R12.1 | length 350.4
  Top Layer w6: R12.1@1768.62,1330 1830,1330 1900,1400 J10.C7@2090,1400
NetJ10_c8: J10.C8 R13.1 | length 329.7
  Top Layer w6: R13.1@1768.62,1280 1855,1280 1875,1300 J10.C8@2090,1300
NetJ10_c9: J10.C9 R14.1 | length 337.9
  Top Layer w6: R14.1@1768.62,1160 1845,1160 1885,1200 J10.C9@2090,1200
NetJ10_c10: J10.C10 R15.1 | length 325.5
  Top Layer w8: R15.1@1768.62,1110 1835,1110 1845,1100 J10.C10@2090,1100
NetJ10_c11: J10.C11 R16.1 | length 346.2
  Top Layer w8: R16.1@1768.62,1060 1825,1060 1885,1000 J10.C11@2090,1000
NetJ10_c12: J10.C12 R17.1 | length 389.4
  Top Layer w6: R17.1@1768.62,1010 1768.62,971.38 1838.6,901.4 2086.62,901.4 cw(c2086.62,896.62) J10.C12@2090,900
NetJ10_c13: J10.C13 R18.1 | length 530.2
  Top Layer w6: R18.1@1640,956.38 1640,930 1770,800 J10.C13@2090,800
NetJ10_c14: J10.C14 R19.1 | length 639.2
  Top Layer w6: R19.1@1590,956.38 1590,900 1790,700 J10.C14@2090,700
NetJ10_c15: J10.C15 R20.1 | length 745.3
  Top Layer w6: R20.1@1540,956.38 1540,875 1815,600 J10.C15@2090,600